# Altium PCB Poc_PCB.PcbDoc
Units mil, origin at the board's own origin, x right, y up, seen from the top; angles counter-clockwise.
Board outline 6000 x 4000 mil, 2 copper layers (Top Layer, Bottom Layer); 91 components, 126 nets, 336 pads, 12 vias.
Unrouted connection lines stored in the file: 189.
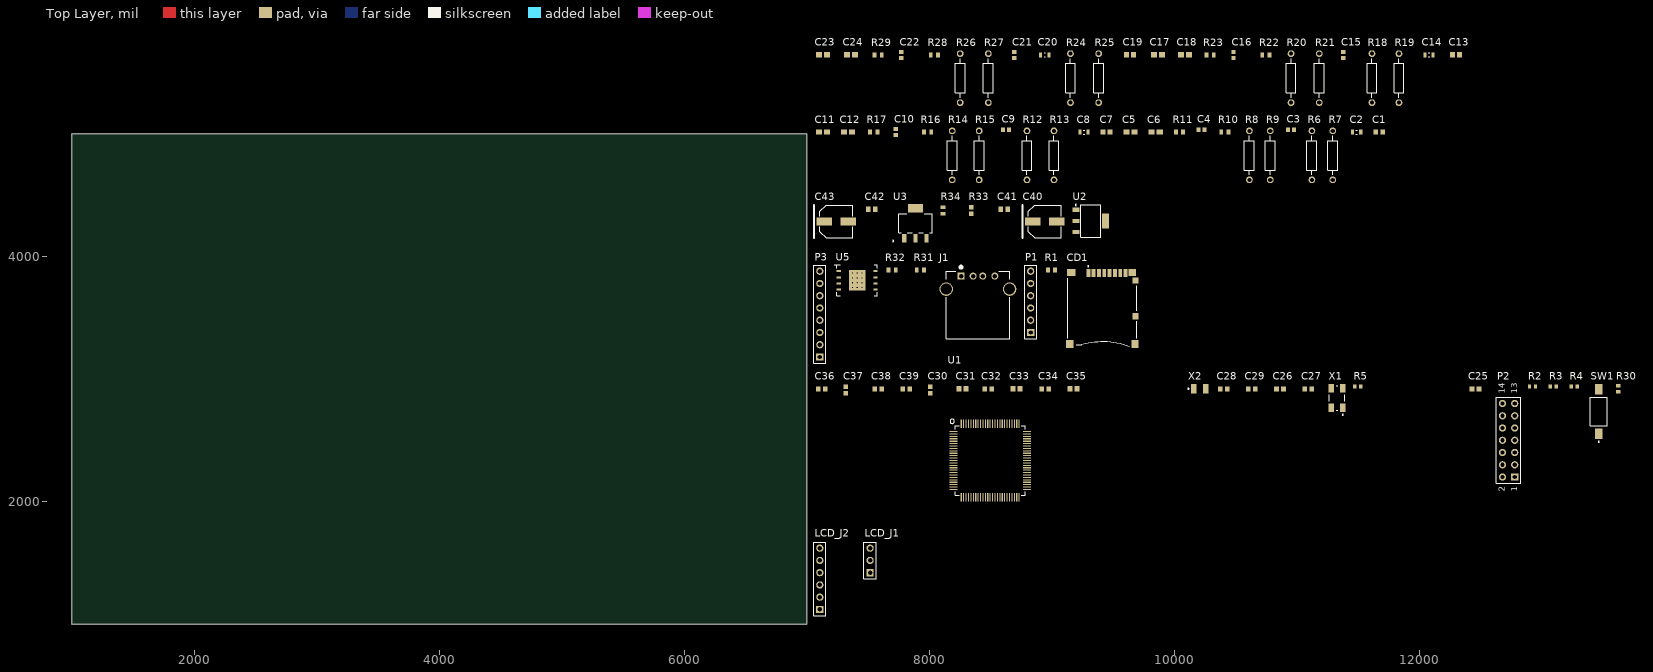
[diagram p0: Top Layer view]
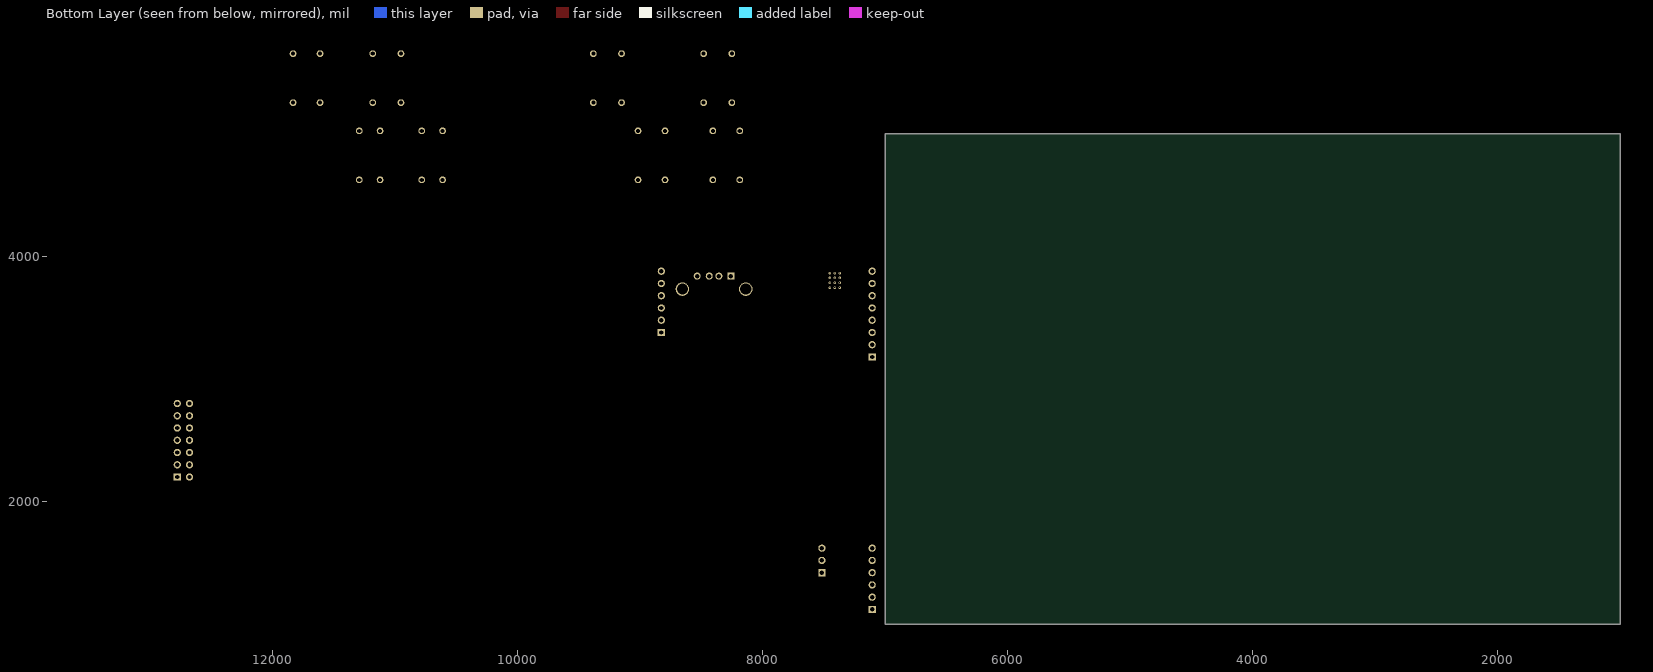
[diagram p1: Bottom Layer view, seen from below]

## Layer stack, top to bottom
Top Solder: solder mask 0.4, Solder Resist, Dk 3.5
Top Layer: signal copper 1.4
Dielectric 1: dielectric 12.6, FR-4, Dk 4.8
Bottom Layer: signal copper 1.4
Bottom Solder: solder mask 0.4, Solder Resist, Dk 3.5

## Board outline
1000,1000 7000,1000 7000,5000 1000,5000

## Design rules (kind name [scope] priority, off if disabled: settings)
Clearance [All] p1: gap=10 ignorepadtopadclearanceinfootprint=FALSE except(0: Arc-Hole Track-Hole SMDPad-Hole THPad-Hole Via-Hole Fill-Hole Poly-Hole Region-Hole Text-Hole)
PolygonConnect [All] p1: connectstyle=Relief reliefconductorwidth=10 reliefentries=4 polygonreliefangle="90 Angle" airgapwidth=10
RoomDefinition Z_Extruder_Motor_Drivers [InComponentClass('Z_Extruder_Motor_Drivers')] p1: confinementstyle=ConfineIn formatcopy=TRUE lockcomponents=FALSE outline 7045,5215 12405,5215 12405,5795 7045,5795
RoomDefinition X_Y_Motor_Drivers [InComponentClass('X_Y_Motor_Drivers')] p2: confinementstyle=ConfineIn formatcopy=TRUE lockcomponents=FALSE outline 7045,4585 11745,4585 11745,5165 7045,5165
RoomDefinition Power [InComponentClass('Power')] p3: confinementstyle=ConfineIn formatcopy=TRUE lockcomponents=FALSE outline 7045,4090 9475,4090 9475,4535 7045,4535
RoomDefinition Memory_USB [InComponentClass('Memory_USB')] p4: confinementstyle=ConfineIn formatcopy=TRUE lockcomponents=FALSE outline 7045,3120 9720,3120 9720,4040 7045,4040
RoomDefinition MCU [InComponentClass('MCU')] p5: confinementstyle=ConfineIn formatcopy=TRUE lockcomponents=FALSE outline 7045,1835 13785,1835 13785,3070 7045,3070
RoomDefinition LCD [InComponentClass('LCD')] p6: confinementstyle=ConfineIn formatcopy=TRUE lockcomponents=FALSE outline 7045,1060 7810,1060 7810,1790 7045,1790
RoutingVias [All] p1: holewidth=28 width=50 viastyle="Through Hole" minholewidth=28 minwidth=50 maxholewidth=28 maxwidth=50
SolderMaskExpansion [All] p1: expansion=4
Width [All] p1: maxlimit=10 minlimit=10 preferedwidth=10
30 further rules are at their usual default settings.

## Classes and differential pairs
component class Z_Extruder_Motor_Drivers: C13 C14 C15 C16 C17 C18 C19 C20 C21 C22 C23 C24 R18 R19 R20 R21 R22 R23 R24 R25 R26 R27 R28 R29 U7 U8
component class X_Y_Motor_Drivers: C1 C2 C3 C4 C5 C6 C7 C8 C9 C10 C11 C12 R6 R7 R8 R9 R10 R11 R12 R13 R14 R15 R16 R17 U4 U6
component class Power: C40 C41 C42 C43 R33 R34 U2 U3
component class Memory_USB: CD1 J1 P1 P3 R1 R31 R32 U5
component class MCU: C25 C26 C27 C28 C29 C30 C31 C32 C33 C34 C35 C36 C37 C38 C39 P2 R2 R3 R4 R5 R30 SW1 U1 X1 X2
component class LCD: LCD_J1 LCD_J2

## Components (designator, comment, footprint, x,y, rotation, side; value= is the part's Value field where it differs from the comment)
C1 "0.022uF" CAPC1608X87X35ML15T15 11670,5015 r0 top
C2 "0.22uF" TDK-C1608-2_A_M 11485,5015 r0 top
C3 "0.01uF" CAPC1608X87X35LL15T15 10950,5035 r0 top
C4 "0.01uF" CAPC1608X87X35LL15T15 10220,5035 r0 top
C5 "0.47uF" CAPC1608X90X35ML15T15 9640,5015 r0 top
C6 "0.47uF" CAPC1608X90X35ML15T15 9845,5015 r0 top
C7 "0.022uF" CAPC1608X87X35ML15T15 9445,5015 r0 top
C8 "0.22uF" TDK-C1608-2_A_M 9260,5015 r0 top
C9 "0.01uF" CAPC1608X87X35LL15T15 8625,5035 r0 top
C10 "0.01uF" CAPC1608X87X35LL15T15 7725,5015 r90 top
C11 "0.47uF" CAPC1608X90X35ML15T15 7130,5015 r0 top
C12 "0.47uF" CAPC1608X90X35ML15T15 7335,5015 r0 top
C13 "0.022uF" CAPC1608X87X35ML15T15 12295,5645 r0 top
C14 "0.22uF" TDK-C1608-2_A_M 12075,5645 r0 top
C15 "0.01uF" CAPC1608X87X35LL15T15 11375,5645 r90 top
C16 "0.01uF" CAPC1608X87X35LL15T15 10480,5645 r90 top
C17 "0.47uF" CAPC1608X90X35ML15T15 9865,5645 r0 top
C18 "0.47uF" CAPC1608X90X35ML15T15 10085,5645 r0 top
C19 "0.022uF" CAPC1608X87X35ML15T15 9635,5645 r0 top
C20 "0.22uF" TDK-C1608-2_A_M 8940,5645 r0 top
C21 "0.01uF" CAPC1608X87X35LL15T15 8690,5645 r90 top
C22 "0.01uF" CAPC1608X87X35LL15T15 7770,5645 r90 top
C23 "0.47uF" CAPC1608X90X35ML15T15 7130,5645 r0 top
C24 "0.47uF" CAPC1608X90X35ML15T15 7360,5645 r0 top
C25 "0.1uF" CAPC1608X90X35ML10T15 12455,2920 r0 top
C26 "GRM1885C1H120JA01D" CAPC1608X90X35ML10T15 10860,2920 r0 top
C27 "GRM1885C1H120JA01D" CAPC1608X90X35ML10T15 11090,2920 r0 top
C28 "GRM1885C1H120JA01D" CAPC1608X90X35ML10T15 10400,2920 r0 top
C29 "GRM1885C1H120JA01D" CAPC1608X90X35ML10T15 10630,2920 r0 top
C30 "1.0uF" CAPC1608X60X35NL10T15 8005,2910 r90 top
C31 "0.01uF" CAPC1608X87X35ML15T15 8270,2920 r0 top
C32 "0.1uF" CAPC1608X90X35ML10T15 8480,2920 r0 top
C33 "0.01uF" CAPC1608X87X35ML15T15 8710,2920 r0 top
C34 "0.1uF" CAPC1608X90X35ML10T15 8945,2920 r0 top
C35 "0.01uF" CAPC1608X87X35ML15T15 9175,2920 r0 top
C36 "2.2uF" CAPC1608X90X35ML10T15 7120,2920 r0 top
C37 "1.0uF" CAPC1608X60X35NL10T15 7315,2910 r90 top
C38 "0.1uF" CAPC1608X90X35ML10T15 7580,2920 r0 top
C39 "0.1uF" CAPC1608X90X35ML10T15 7810,2920 r0 top
C40 "EEEFP1V470AP" PNSC-FP-V-D_V 8940,4285 r0 top
C41 "0.1uF" CAPC1608X90X35ML10T15 8610,4385 r0 top
C42 "0.1uF" CAPC1608X90X35ML10T15 7530,4385 r0 top
C43 "EEEFP1V470AP" PNSC-FP-V-D_V 7240,4285 r0 top
CD1 "502774-0891" MOLX-502774-0891_V 9410,3575 r0 top
J1 "292303-1" TE-292303-1_V 8395,3795 r0 top
LCD_J1 "Header 3" HDR1X3 7515,1420 r90 top
LCD_J2 "Header 6" HDR1X6 7105,1120 r90 top
P1 "Header 6" HDR1X6 8825,3380 r90 top
P2 "Header 7X2" HDR2X7 12775,2200 r90 top
P3 "Header 8" HDR1X8 7105,3180 r90 top
R1 "100K" RESC1608X55X25ML10T15 8995,3890 r0 top
R2 "10k" RESC1608X55X30LL15T15 12920,2940 r0 top
R3 "10k" RESC1608X55X30LL15T15 13090,2940 r0 top
R4 "100" RESC1608X55X30LL15T15 13260,2940 r0 top
R5 "10k" RESC1608X55X30LL15T15 11495,2940 r0 top
R6 "?" AXIAL-0.4 11120,4825 r90 top value=1K
R7 "?" AXIAL-0.4 11290,4825 r90 top value=1K
R8 "Res2" AXIAL-0.4 10610,4825 r90 top value=1K
R9 "Res2" AXIAL-0.4 10780,4825 r90 top value=1K
R10 "5k" RESC1608X55X25ML10T15 10410,5015 r0 top
R11 "15k" RESC1608X55X25ML10T15 10040,5015 r0 top
R12 "?" AXIAL-0.4 8795,4825 r90 top value=1K
R13 "?" AXIAL-0.4 9015,4825 r90 top value=1K
R14 "Res2" AXIAL-0.4 8185,4825 r90 top value=1K
R15 "Res2" AXIAL-0.4 8405,4825 r90 top value=1K
R16 "5k" RESC1608X55X25ML10T15 7985,5015 r0 top
R17 "15k" RESC1608X55X25ML10T15 7545,5015 r0 top
R18 "?" AXIAL-0.4 11610,5455 r90 top value=1K
R19 "?" AXIAL-0.4 11830,5455 r90 top value=1K
R20 "Res2" AXIAL-0.4 10950,5455 r90 top value=1K
R21 "Res2" AXIAL-0.4 11180,5455 r90 top value=1K
R22 "5k" RESC1608X55X25ML10T15 10745,5645 r0 top
R23 "15k" RESC1608X55X25ML10T15 10290,5645 r0 top
R24 "?" AXIAL-0.4 9150,5455 r90 top value=1K
R25 "?" AXIAL-0.4 9380,5455 r90 top value=1K
R26 "Res2" AXIAL-0.4 8250,5455 r90 top value=1K
R27 "Res2" AXIAL-0.4 8480,5455 r90 top value=1K
R28 "5k" RESC1608X55X25ML10T15 8040,5645 r0 top
R29 "15k" RESC1608X55X25ML10T15 7580,5645 r0 top
R30 "10k" RESC1608X55X30LL15T15 13620,2920 r90 top
R31 "0" RESC1608X55X25ML10T15 7925,3890 r0 top
R32 "0" RESC1608X55X25ML10T15 7695,3890 r0 top
R33 "200" RESC1608X55X30NL20T20 8340,4375 r90 top
R34 "330" RESC1608X55X30NL15T15 8110,4375 r90 top
SW1 "FSMSMTR" TECO-FSMSMTR_V 13460,2735 r90 top
U1 "Part Number: TM4C123GH6PZI7" PZ100 8495,2335 r0 top value=Value
U2 "LM317AEMP/NOPB" DCY0004A_L 9315,4290 r0 top
U3 "Part Number: LM7805MPX/NOPB" DCY4 7885,4270 r0 top value=Value
U5 "MT25QL128ABA1EW9-0SIT" MICT-W9-8_L 7410,3805 r0 top
X1 "ABM3B-16.000MHZ-B2-T" ABRA-ABM3B-4_V 11325,2845 r90 top
X2 "ABS07-32.768KHz-T" ABRA-ABS07-2_V 10205,2920 r0 top

## Footprints (in the part's own frame and the unit in brackets; to place one, negate y for a bottom-side part, rotate by r counter-clockwise, add the part's x,y. Pads: shape width x height; smd on the part's side, far side on the other; paste and mask are expansions set on the pad)
ABRA-ABM3B-4_V [mm] "SMD, 4-Leads, Body 5x3.2mm"
  rect 1.8x1.2 smd: 1(-2,-1.2) 2(2,-1.2) 3(2,1.2) 4(-2,1.2)
  silkscreen extent -3.57,-1.6 2.5,1.6, body extent -2.5,-1.59 2.5,1.59, height 1.13
ABRA-ABS07-2_V [mm] "Hand Drawn, 2-Leads, Body 3.2x1.5mm, Pitch 2.5mm"
  rect 1.1x1.9 smd: 1(-1.25,0) 2(1.25,0)
  silkscreen extent -2.47,-0.12 -2.22,0.12, body extent -1.6,-0.75 1.6,0.75, height 0.9
AXIAL-0.4 [mm] "Axial Device, Thru-Hole; 2 Leads; 0.4 in Pin Spacing"
  round 1.4 hole 0.85: 1(-5.08,0) 2(5.08,0)
  silkscreen extent -4.06,-1.02 4.06,1.02
CAPC1608X60X35NL10T15 [mm] "Chip Capacitor, 2-Leads, Body 1.60x0.80mm, IPC Medium Density"
  rect 0.85x0.95 smd: 1(-0.675,0) 2(0.675,0)
  body extent -0.85,-0.45 0.85,0.45, height 0.6
CAPC1608X87X35LL15T15 [mm] "Chip Capacitor, 2-Leads, Body 1.60x0.80mm, IPC High Density"
  rect 0.8x0.9 smd: 1(-0.625,0) 2(0.625,0)
  body extent -0.87,-0.48 0.87,0.48, height 0.87
CAPC1608X87X35ML15T15 [mm] "Chip Capacitor, 2-Leads, Body 1.60x0.80mm, IPC Low Density"
  rect 1x1.1 smd: 1(-0.725,0) 2(0.725,0)
  body extent -0.87,-0.48 0.87,0.47, height 0.87
CAPC1608X90X35ML10T15 [mm] "Chip Capacitor, 2-Leads, Body 1.7x0.9mm, IPC Low Density"
  rect 0.95x1.05 smd: 1(-0.725,0) 2(0.725,0)
  body extent -0.85,-0.45 0.85,0.45, height 0.9
CAPC1608X90X35ML15T15 [mm] "Chip Capacitor, 2-Leads, Body 1.60x0.81mm, IPC Low Density"
  rect 1.25x1.1 smd: 1(-0.85,0) 2(0.85,0)
  body extent -0.88,-0.48 0.87,0.48, height 0.9
DCY4 [mil]
  rect 35x69.5 smd paste+0 mask+0: 1(-91,-122.75) 2(0,-122.75) 3(91,-122.75)
  rect 124x69.5 smd paste+0 mask+0: 4(0,122.75)
  silkscreen extent -187,-148 137,78, body extent -132,-144 132,144, height 67
DCY0004A_L [mm] "SOT223, 4-Leads, Body 6.7x3.7mm, Pitch 2.3mm, IPC High Density"
  rrect11% 1.45x0.9 smd: 1(-3.075,2.3) 2(-3.075,0) 3(-3.075,-2.3)
  rrect7% 1.45x3.15 smd: 4(3.075,0)
  silkscreen extent -3.2,-3.35 2.05,3.42, body extent -3.5,-3.25 3.5,3.25, height 1.62
HDR1X3 [mm] "Connector; Header; 3 Position"
  rect 1.5x1.5 hole 0.9: 1(0,0)
  round 1.5 hole 0.9: 2(2.54,0) 3(5.08,0)
  silkscreen extent -1.27,-1.27 6.35,1.27
HDR1X6 [mm] "Connector; Header; 6 Position"
  rect 1.5x1.5 hole 0.9: 1(0,0)
  round 1.5 hole 0.9: 2(2.54,0) 3(5.08,0) 4(7.62,0) 5(10.16,0) 6(12.7,0)
  silkscreen extent -1.27,-1.27 13.97,1.27
HDR1X8 [mm] "Connector; Header; 8 Position"
  rect 1.5x1.5 hole 0.9: 1(0,0)
  round 1.5 hole 0.9: 2(2.54,0) 3(5.08,0) 4(7.62,0) 5(10.16,0) 6(12.7,0) 7(15.24,0) 8(17.78,0)
  silkscreen extent -1.27,-1.27 19.05,1.27
HDR2X7 [mm] "Connector; Header; 7x2 Position"
  rect 1.5x1.5 hole 0.9: 1(0,0)
  round 1.5 hole 0.9: 2(0,2.54) 3(2.54,0) 4(2.54,2.54) 5(5.08,0) 6(5.08,2.54) 7(7.62,0) 8(7.62,2.54) 9(10.16,0) 10(10.16,2.54) 11(12.7,0) 12(12.7,2.54) 13(15.24,0) 14(15.24,2.54)
  silkscreen extent -1.27,-1.27 16.51,3.81
MICT-W9-8_L [mm] "SON, 8-Leads, Body 8.1x6.1mm, Pitch 1.27mm, Thermal Pad 3.4x4.3mm, IPC High Density"
  rect 0.85x0.4 smd: 1(-3.82,1.905) 2(-3.82,0.635) 3(-3.82,-0.635) 4(-3.82,-1.905) 5(3.82,-1.905) 6(3.82,-0.635) 7(3.82,0.635) 8(3.82,1.905)
  rect 3.4x4.3 smd paste-1.7: 9(0,0)
  silkscreen extent -4.65,-3.2 4.2,3.25, body extent -4.05,-3.05 4.05,3.05, height 0.8
MOLX-502774-0891_V [mm] "SMD, 14-Leads, Body 15x14.3mm, Pitch 1.1mm"
  rect 0.8x1.68 smd: 1(-2.9,7.385) 2(-1.8,7.385) 3(-0.7,7.385) 4(0.4,7.385) 5(1.5,7.385) 6(2.6,7.385) 7(3.7,7.385) 8(4.8,7.385)
  rect 1.29x1.3 smd: 9(6.855,5.825)
  rect 1.29x1.4 smd: 10(6.855,-1.575)
  rect 1.5x1.7 smd: 11(6.75,-7.375) 12(-6.75,-7.375)
  rect 1.7x1.5 smd: 13(-6.45,7.475)
  rect 1.6x1.5 smd: 14(6.21,7.475)
  silkscreen extent -7.15,-7.88 7.15,8.9, body extent -7.15,-8 7.15,8, height 1.78
PNSC-FP-V-D_V [mm] "CAPAE, 2-Leads, Body 6.80x6.80mm"
  rect 3.2x1.6 smd: 1(-2.5,0) 2(2.5,0)
  silkscreen extent -4.6,-3.4 3.4,3.4, body extent -3.9,-3.4 3.9,3.4, height 6.1
PZ100 [mil]
  rect 66x9 smd paste+0 mask+0: 1(-300,236.22) 2(-300,216.54) 3(-300,196.85) 4(-300,177.17) 5(-300,157.48) 6(-300,137.8) 7(-300,118.11) 8(-300,98.43) 9(-300,78.74) 10(-300,59.06) 11(-300,39.37) 12(-300,19.69) 13(-300,0) 14(-300,-19.68) 15(-300,-39.37) 16(-300,-59.06) 17(-300,-78.74) 18(-300,-98.43) 19(-300,-118.11) 20(-300,-137.8) 21(-300,-157.48) 22(-300,-177.17) 23(-300,-196.85) 24(-300,-216.54) 25(-300,-236.22) 51(300,-236.22) 52(300,-216.54) 53(300,-196.85) 54(300,-177.17) 55(300,-157.48) 56(300,-137.8) 57(300,-118.11) 58(300,-98.43) 59(300,-78.74) 60(300,-59.06) 61(300,-39.37) 62(300,-19.68) 63(300,0) 64(300,19.68) 65(300,39.37) 66(300,59.06) 67(300,78.74) 68(300,98.43) 69(300,118.11) 70(300,137.8) 71(300,157.48) 72(300,177.17) 73(300,196.85) 74(300,216.54) 75(300,236.22)
  rect 9x66 smd paste+0 mask+0: 26(-236.22,-300) 27(-216.54,-300) 28(-196.85,-300) 29(-177.17,-300) 30(-157.48,-300) 31(-137.8,-300) 32(-118.11,-300) 33(-98.43,-300) 34(-78.74,-300) 35(-59.06,-300) 36(-39.37,-300) 37(-19.68,-300) 38(0,-300) 39(19.68,-300) 40(39.37,-300) 41(59.06,-300) 42(78.74,-300) 43(98.43,-300) 44(118.11,-300) 45(137.8,-300) 46(157.48,-300) 47(177.17,-300) 48(196.85,-300) 49(216.54,-300) 50(236.22,-300) 76(236.22,300) 77(216.54,300) 78(196.85,300) 79(177.17,300) 80(157.48,300) 81(137.8,300) 82(118.11,300) 83(98.43,300) 84(78.74,300) 85(59.06,300) 86(39.37,300) 87(19.68,300) 88(0,300) 89(-19.68,300) 90(-39.37,300) 91(-59.06,300) 92(-78.74,300) 93(-98.43,300) 94(-118.11,300) 95(-137.8,300) 96(-157.48,300) 97(-177.17,300) 98(-196.85,300) 99(-216.54,300) 100(-236.22,300)
  silkscreen extent -328,-284 284,338, body extent -319,-319 319,760, height 63
RESC1608X55X25ML10T15 [mm] "Chip Resistor, 2-Leads, Body 1.60x0.80mm, IPC Low Density"
  rect 0.8x1 smd: 1(-0.75,0) 2(0.75,0)
  body extent -0.85,-0.45 0.85,0.45, height 0.55
RESC1608X55X30LL15T15 [mm] "Chip Resistor, 2-Leads, Body 1.60x0.80mm, IPC High Density"
  rect 0.7x0.85 smd: 1(-0.625,0) 2(0.625,0)
  body extent -0.87,-0.48 0.87,0.48, height 0.55
RESC1608X55X30NL15T15 [mm] "Chip Resistor, 2-Leads, Body 1.60x0.80mm, IPC Medium Density"
  rect 0.8x0.95 smd: 1(-0.675,0) 2(0.675,0)
  body extent -0.87,-0.48 0.87,0.48, height 0.55
RESC1608X55X30NL20T20 [mm] "Chip Resistor, 2-Leads, Body 1.60x0.80mm, IPC Medium Density"
  rect 0.9x1 smd: 1(-0.65,0) 2(0.65,0)
  body extent -0.9,-0.5 0.9,0.5, height 0.55
TDK-C1608-2_A_M [mm] "Chip Capacitor, 2-Leads, Body 1.7x0.9mm, IPC Low Density"
  rect 0.65x1.05 smd: 1(-0.85,0) 2(0.85,0)
  silkscreen extent -0.15,-0.43 0.15,0.43, body extent -0.85,-0.45 0.85,0.45, height 0.9
TE-292303-1_V [mm] "THD, 4-Leads, Body 13.13x14mm, Pitch 2.5mm"
  rect 1.45x1.45 hole 0.92: 1(-3.5,1.144)
  round 1.45 hole 0.92: 2(-1,1.144) 3(1,1.144) 4(3.5,1.144)
  round 2.8 hole 2.3: 5(-6.57,-1.566) 6(6.57,-1.566)
  silkscreen extent -6.57,-11.85 6.57,3.25, body extent -8.12,-11.85 8.12,2.15, height 7.72
TECO-FSMSMTR_V [mm] "SMD, 2-Leads, Body 6x3.5mm, Pitch 9.19mm"
  rect 2.2x1.6 smd: 1(-4.595,0)
  rect 2.18x1.6 smd: 2(4.595,0)
  silkscreen extent -6.37,-1.75 3,1.75, body extent -4.98,-1.75 4.98,1.75, height 4.4

## Part data
C1 C7 C13 C19: library part CMP-2006-03139-1, Manufacturer=Kemet, Part Number=C0603C223K4RACTU
C2 C8 C14 C20: library part CMP-2000-05394-1, "Cap Ceramic, 0.22 uF, +/- 10%, -55 to 125 degC, 2-Pin SMD (0603), RoHS, Tape and Reel", Capacitance=0.22µF, Manufacturer=TDK, Operating Temperature=-55degC~125degC, Package / Case=0603(1608Metric), Package Description="2-Pin Chip Capacitor, Body 1.7 x 0.9 mm", Package Reference=603, PCN Part Number=MLCCPartNumberChange30/Nov/2012, Ratings=-, Standard Package=1, Temperature Coefficient=X7R, Tolerance=±10%, Voltage - Rated=50V, Applications=GeneralPurpose, Category=Capacitors, Datasheet URL=https://datasheet.ciiva.com/24218/c1608x7r1h224k080ab-264841-24218813.pdf, Datasheet Version=Sep-13, Design Resources=20WNon-IsolatedBuckLEDDriverUsingPLLNK460KG, Family=CeramicCapacitors, Features=-, Height - Seated (Max)=-, Kits=445-9014-KIT-ND-KITMLCC100PF-22UF060310-50V445-9003-KIT-ND-KITCAPCERHICAPMLCCSMD445-173086-KIT-ND-C0402-2220X7R6.3-50V1,000PF-, Lead Spacing=-, Lead Style=-, Manufacturer URL=http://www.tdk.com/, Mounting Type=SurfaceMount,MLCC, Online Catalog=CSeries,GeneralPurpose, Other Names=445-7408-1, Packaging=CutTape(CT), Product Training Modules=CSeriesGeneralApplicationsSEAT,CCV,andTVCLDesignToolsGuidetoReplacinganElectrolyticCapacitorwithanMLCC, RoHS Information=RoHSCertificate-MLCC, Series=C, Size / Dimension="0.063\"Lx0.031\"W(1.60mmx0.80mm)", Thickness (Max)="0.035\"(0.90mm)"
C3 C4 C9 C10 C15 C16 C21 C22: library part CMP-2006-03299-1, Manufacturer=Kemet, Part Number=C0603X103K5RACTU
C5 C6 C11 C12 C17 C18 C23 C24: library part CMP-2006-04187-1, Manufacturer="AVX Interconnect / Elco", Part Number=06033C474KAT2A
C25 C32 C34 C38 C39 C41 C42: library part CMP-2100-03643-1, "Chip Capacitor, 0.1 uF, +/- 10%, 50 V, -55 to 125 degC, 0603 (1608 Metric), RoHS, Tape and Reel", Capacitance=100nF, Case/Package=0603, Case Code (Metric)=1608, Dielectric=X7R, Dielectric Material=Ceramic, Insulation Resistance=10GR, Manufacturer=Murata, Max Operating Temperature=125degC, Min Operating Temperature=-55degC, Package Description="2-Pin Surface Mount Device, Body 1.6 x 0.8 mm", Package Quantity=1, Tolerance=10%, Voltage=50V, Case Code (Imperial)=0603, Contact Plating=Tin, Datasheet URL=http://psearch.en.murata.com/capacitor/product/GRM188R71H104KA93%23.pdf, Datasheet Version=42675.0, Depth=0.8mm, Height=0.8mm, Lead Free=LeadFree, Length=1.6mm, Manufacturer URL=http://www.murata.com/, Material=Ceramic, Mount=SurfaceMount, Number of Pins=2, Package Reference=0603, Packaging=TapeandReel, Radiation Hardening=No, REACH SVHC=NoSVHC, RoHSCompliant=true, Termination=SMD/SMT, Thickness=0.035inch, Voltage Rating=50V, Voltage Rating (DC)=50V, Width=0.8mm
C26 C27 C28 C29: library part CMP-2006-02602-1, Manufacturer=Murata, Part Number=GRM1885C1H120JA01D
C30 C37: library part CMP-2006-00116-1, Manufacturer=Murata, Part Number=GRM185R61C105KE44J
C31 C33 C35: library part CMP-2006-03042-1, Manufacturer=Kemet, Part Number=C0603C103K4RACTU
C36: library part CMP-2006-02836-1, Manufacturer=Murata, Part Number=GRM188R71A225KE15D
C40 C43: library part CMP-2000-06216-1, "Aluminum Electrolytic Capacitor, 47 uF, +/- 20%, 35 V, 2-Pin SMD (Size Code D), -55 to 105 degC, RoHS, Tape and Reel", Capacitance=47µF, Case Size/Dimension=Ø6.3x5.8mm, ESR (Equivalent Series Resistance)=0.26O, Lifetime@Temperature=2000Hrs@105°C, Manufacturer=Panasonic, Operating Temp-Max=105°C, Operating Temp Range=-55to+105°C, Package Description="2-Pin Electrolytic Aluminum Capacitor, Body 6.6 x 6.6 mm", Package Reference=FP-V-D, Rated Voltage=35V, Ripple Current=300mA, Datasheet URL=http://industrial.panasonic.com/cdbs/www-data/pdf/RDE0000/ABA0000C1184.pdf, Datasheet Version=03/2016, Manufacturer URL=http://www.panasonic.com/, Mounting Technology=SurfaceMount, Package URL=http://industrial.panasonic.com/cdbs/www-data/pdf/RDE0000/DME0000COL48.pdf, Series=FP, Type=Can
CD1: library part CMP-2000-05248-1, "Micro SD Memory Card Connector, 0.5 A, 10 V (DC), -25 to 85 degC, 8-Pin SMT, RoHS, Tape and Reel", Manufacturer=Molex, Standard Package=1, 3D Model=502774-0891.stp, Card Type=SecureDigital-microSD™, Catalog Drawings=502774-0891, Category=Connectors,Interconnects, Connector Type=ConnectorandEjector, Contact Finish=Gold, Contact Finish Thickness=20µin(0.51µm), Datasheet URL=https://datasheet.ciiva.com/1104/1499551-1104671.pdf, Datasheet Version="Rev. D, 04/2004", Ejector Side=-, Family=MemoryConnectors-PCCardSockets, Features=Switch, Height Above Board="0.071\"(1.80mm)", Insertion, Removal Method=PushIn,PushOut, Manufacturer URL=http://www.molex.com/, Mounting Feature=Reverse-Bottom, Mounting Type=SurfaceMount,RightAngle, Number of Positions=10(8+2), Online Catalog=microSD™Series, Other Names=WM24066DKR, Packaging=Digi-Reel, RoHS Information=502774-0891CertofCompliance, Series=502774
J1: library part CMP-2000-05404-1, "1 Port Right Angle Through Hole Mount Female Type A USB Connector, 4 Position, -55 to 85 degC, RoHS, Tube", Manufacturer="TE Connectivity", Package Description="4-Pin Through Hole Device, Body 14 x 13.13 mm, Pitch 2.5 mm", Connector Mounting=PCB, Connector Type=USBA, Contact Material=Copper, Contact Plating=Gold, Contact Termination Type=Solder, Datasheet URL=http://www.farnell.com/cad/1653030.pdf, Datasheet Version=Feb-12, Gender=Receptacle, Manufacturer URL=http://www.te.com/, No. of Contacts=4, Package Reference=292303-1, SVHC=NoSVHC(16-Jun-2014)
LCD_J1: "Header, 3-Pin", LatestRevisionDate=17-Jul-2002, LatestRevisionNote="Re-released for DXP Platform.", Publisher="Altium Limited"
LCD_J2 P1: "Header, 6-Pin", LatestRevisionDate=17-Jul-2002, LatestRevisionNote="Re-released for DXP Platform.", Publisher="Altium Limited"
P2: "Header, 7-Pin, Dual row", LatestRevisionDate=17-Jul-2002, LatestRevisionNote="Re-released for DXP Platform.", Publisher="Altium Limited"
P3: "Header, 8-Pin", LatestRevisionDate=17-Jul-2002, LatestRevisionNote="Re-released for DXP Platform.", Publisher="Altium Limited"
R1: library part CMP-2100-03662-1, "Chip Resistor, 100 KOhm, +/- 1%, 0.1 W, -55 to 155 degC, 0603 (1608 Metric), RoHS, Tape and Reel", Case/Package=0603, Case Code (Metric)=1608, Manufacturer=Yageo, Max Operating Temperature=155degC, Min Operating Temperature=-55degC, Package Description="2-Pin Surface Mount Device, Body 1.6 x 0.8 mm", Power Rating=100mW, Resistance=100KOhm, Temperature Coefficient=100ppm/degreesC, Tolerance=1%, Voltage Rating=50V, Case Code (Imperial)=0603, Composition=ThickFilm, Datasheet URL=http://www.yageo.com/NewPortal/yageodocoutput?fileName=/pdf/R-Chip/PYu-RC_Group_51_RoHS_L_5.pdf, Datasheet Version="Rev. 5, 10/2016", Depth=0.8mm, Height=0.45mm, Lead Free=LeadFree, Length=1.6mm, Manufacturer URL=http://www.yageo.com/, Military Standard=Not, Number of Pins=2, Package Reference=0603, Packaging=TapeandReel, REACH SVHC=NoSVHC, RoHSCompliant=true, Termination=SMD/SMT, Voltage Rating (DC)=50V, Width=0.8mm
R2 R3 R4 R5 R30: library part CMP-2000-00181-1, Manufacturer=Panasonic, Part Number=ERJ-3EKF1002V
R6 R7 R12 R13 R18 R19 R24 R25: library part Res2, "Resistor", LatestRevisionDate=17-Jul-2002, LatestRevisionNote="Re-released for DXP Platform.", PackageDescription="Axial Device, Thru-Hole; 2 Leads; 0.4 in Pin Spacing", PackageReference=AXIAL-0.4, Published=8-Jun-2000, Publisher="Altium Limited"
R8 R9 R14 R15 R20 R21 R26 R27: "Resistor", LatestRevisionDate=17-Jul-2002, LatestRevisionNote="Re-released for DXP Platform.", PackageDescription="Axial Device, Thru-Hole; 2 Leads; 0.4 in Pin Spacing", PackageReference=AXIAL-0.4, Published=8-Jun-2000, Publisher="Altium Limited"
R10 R11 R16 R17 R22 R23 R28 R29 R31 R32: library part CMP-2100-03667-1, "Chip Resistor, 0 Ohm, +/- 5%, 0.1 W, -55 to 155 degC, 0603 (1608 Metric), RoHS, Tape and Reel", Case/Package=0603, Case Code (Metric)=1608, Manufacturer=Yageo, Max Operating Temperature=155degC, Min Operating Temperature=-55degC, Package Description="2-Pin Surface Mount Device, Body 1.6 x 0.8 mm", Package Quantity=5000, Power Rating=100mW, Resistance=0mOhm, Temperature Coefficient=200ppm/degreesC, Tolerance=5%, Voltage Rating=50V, Case Code (Imperial)=0603, Composition=ThickFilm, Contact Plating=Tin, Datasheet URL=http://www.yageo.com/NewPortal/yageodocoutput?fileName=/pdf/R-Chip/PYu-RC_Group_51_RoHS_L_5.pdf, Datasheet Version="Rev. 5, 10/2016", Depth=0.8mm, Height=0.45mm, Lead Free=LeadFree, Length=1.6mm, Manufacturer URL=http://www.yageo.com/, Military Standard=Not, Number of Pins=2, Package Reference=0603, Packaging=TapeandReel, Radiation Hardening=No, REACH SVHC=NoSVHC, RoHSCompliant=true, Termination=SMD/SMT, Voltage Rating (DC)=50V, Width=0.8mm
R33: library part CMP-2000-00944-1, Manufacturer=Panasonic, Part Number=ERA3AEB201V
R34: library part CMP-2000-00435-1, Manufacturer=Panasonic, Part Number=ERJ3EKF3300V
SW1: library part CMP-2000-07501-1, "FSMSM Push Button Switch, 50 mA, -35 to 85 degC, 2-Pin SMD, RoHS, Tape and Reel", Case\/Package=SMD/SMT, Contact Current Rating=50mA, Contact Resistance=100mOhm, Manufacturer="TE Connectivity", Max Operating Temperature=85degC, Max Voltage Rating (DC)=12V, Min Operating Temperature=-35degC, Operating Force=180gf, Package Description="2-Pin Surface Mount Device, Body 6 x 3.5 mm, Pitch 9.19 mm", Package Quantity=1800, Voltage Rating (DC)=24V, Actuator Length=1.07mm, Actuator Material=Polyamide, Contact Material=Brass, Contact Plating=Silver, Current Rating=50mA, Datasheet URL=http://www.te.com/commerce/DocumentDelivery/DDEController?Action=showdoc&DocId=Customer+Drawing%7F1437566-3%7FC2%7Fpdf%7FEnglish%7FENG_CD_1437566-3_C2_1437566_3_1_c.dwg.pdf%7F1437566-4, Datasheet Version="Rev. C2, 08/2014", Electrical Life=20000Cycles, ELV=Compliant, Illumination Type=Illuminated, Lead Free=LeadFree, Manufacturer URL=http://www.te.com/, Mechanical Life=20000Cycles, Mount=SurfaceMount, Mounting Technology=SurfaceMount, Orientation=Straight, Package Reference=FSMSMTR, Packaging=TapeandReel, REACH SVHC=Unknown, RoHSCompliant=true, Switch Travel=0.25mm, Termination=GullWing, Throw Configuration=SPST
U1: library part TM4C123GH6PZI7, "No Description Available", Built_By=EMA_UL_Team, Copyright="Copyright (C) 2018 Accelerated Designs. All rights reserved", Manufacturer_Part_Number=TM4C123GH6PZI7, RefDes=RefDes, Type=DEV, Vendor="Texas Instruments"
U2: library part CMP-0062-01710-3, "3-Terminal Adjustable Regulator, 4-pin SOT-223, Pb-Free", Manufacturer="Texas Instruments", PackageTopMarking=XYTT*N07A, PowerWise=N, Code_IPC=SOT223-4, Code_JEDEC=TO-261-AA, ComponentLink1Description="Datasheet URL", ComponentLink1URL=http://www.ti.com/general/docs/lit/getliterature.tsp?genericPartNumber=LM317-N&fileType=pdf, CompType="LDO IC", PackageDescription="Molded SOT-223, 6.50 x 3.56 x 1.6mm Body, 4 Lead, 2.3mm Pitch", PackageReference=DCY0004A, PinCount=4, RoHS=Y
U3: library part LM7805MPX/NOPB, "No Description Available", Built_By=EMA_Jessica, Copyright="Copyright (C) 2018 Accelerated Designs. All rights reserved", Manufacturer_Part_Number=LM7805MPX/NOPB, RefDes=RefDes, Type=DEV, Vendor="Texas Instruments"
U5: library part CMP-2000-07470-1, "Micron Serial NOR Flash Memory, 2.7 to 3.6 V, 128 Mb, -40 to 85 degC, 8-Pin W-PDFN (W9), RoHS, Tape and Reel", Manufacturer=Micron, Package Description="8-Pin Plastic Dual Flat No-lead Package, Body 8 x 6 mm, Pitch 1.27 mm", Package Reference=W9, Datasheet URL=https://www.micron.com/~/media/documents/products/data-sheet/nor-flash/serial-nor/mt25q/die-rev-a/mt25q_qlhs_l_128_aba_0.pdf, Datasheet Version="Rev. I , 09/2016", Manufacturer URL=http://www.micron.com/, Mounting Technology=SurfaceMount, RoHSCompliant=false
X1: library part CMP-1688-00003-1, "Ceramic SMD Crystal, 16 MHz, +/- 20 ppm, 50 Ohm, -20 to 70 degC, 4-Pin SMD, RoHS, Tape and Reel", Case/Package=5028, Current Rating="1.82 A", Max Operating Temperature=105degC, Min Operating Temperature=-40degC, Package Quantity=500, Resistance="0.033 Ohm", Tolerance=30%, ComponentLink1Description="Manufacturer URL", ComponentLink1URL=http://www.abracon.com/, ComponentLink2Description=Datasheet, ComponentLink2URL=http://www.abracon.com/Resonators/abm3b.pdf, DatasheetVersion=Aug-15, Height="2.8 mm", Length="0.197 inch", Mount="Surface Mount", PackageDescription="4-Pin Surface Mount Device, Body 5 x 3.2 mm", PackageReference=ABM3B, Packaging="Tape and Reel", REACH SVHC=Unknown, RoHSCompliant=True, Shielding=Shielded, Width="0.197 inch"
X2: library part CMP-0447-00001-2, "Crystal, 32.768 kHz, 12.5 pF, -40 to 85 degC, SMD Low Profile 3.2 x 1.5 x 0.9 mm, Tape and Reel", Equivalent Series Resistance (R1)="70 Kohm", Frequency="32.768 kHz", Frequency Tolerance @+25degC="+/- 20 ppm", Insulation Resistance (Min)="500 Mohm", Load Capacitance (CL)="12.5 pF", Manufacturer=Abracon, Operating Temperature="-40 to 85 degC", Q Value (Type)=30000, Shunt Capacitance (C0)="0.9 to 1.2 pF", ComponentLink1Description="Manufacturer URL", ComponentLink1URL=http://www.abracon.com/, ComponentLink2Description=Datasheet, ComponentLink2URL=http://www.abracon.com/Resonators/ABS07.pdf, ComponentLink3Description="Package Specification", ComponentLink3URL=http://www.abracon.com/Resonators/ABS07.pdf, DatasheetVersion=04.03.13, Drive Level (Type)="0.1 uW", Mounting Technology="Surface Mount", Operation Mode="Flexural Mode (Tuning Fork)", PackageDescription="2-Pin Hand Drawn, Body 3.2x1.5mm, Pitch 2.5mm", PackageReference=ABS07-2, Packing="Tape and Reel", PartNumber=ABS07-32.768KHz-T

## Via types
v1: diameter 19.68, hole 7.87, Top Layer to Bottom Layer, 12 vias

## Nets (pads, with @x,y where several pads share a name; then routed paths per layer and width w, separated by ;. In a path a pad name is that pad's centre, name@x,y a point inside that pad or via, vN(x,y) a via of type N, cw(c..) or ccw(c..) an arc to the next point about the centre after c; other vN are vias at no path point)
3V3: R2.2 R3.2 R4.2 R6.2 R7.2 R12.2 R13.2 R18.2 R19.2 R24.2 R25.2
+3V3: CD1.4 P3.1 R1.2 R30.2 U5.8
+5V: C43.1 J1.1 LCD_J1.3 LCD_J2.6 R31.2 U3.3
+24V: C41.2 C42.2 U2.3 U3.1
Clock: CD1.5 P1.3
Data_In: CD1.3 P1.4
Data_Out: CD1.7 P1.2
EX_\SLEEP: U1.99
EX_AOUT1: 
EX_AOUT2: 
EX_BOUT1: 
EX_BOUT2: 
EX_CPH: C19.1
EX_CPL: C19.2
EX_Decay: R24.1 R26.2
EX_DIR: U1.97
EX_ENABLE: U1.98
EX_M0: U1.95
EX_M1: U1.91
EX_nFAULT: R28.2 U1.100
EX_STEP: 
EX_TRQ: R25.1 R27.2
EX_VCP: C20.2
EX_VM: C20.1 C21.1 C22.1
FLASH_Clk: P3.4 U1.42 U5.6
FLASH_Hold: P3.7 U5.7
FLASH_MISO: P3.3 U1.40 U5.2
FLASH_MOSI: P3.2 U1.41 U5.5
FLASH_nCS: P3.5 U1.43 U5.1
FLASH_WP: P3.6 U5.3
GND: C3.2 C4.2 C5.1 C6.1 C9.2 C10.2 C11.1 C12.1 C15.2 C16.2 C17.1 C18.1 C21.2 C22.2 C23.1 C24.1 C25.1 C26.1 C27.1 C30.1 C31.1 C32.1 C33.1 C34.1 C35.1 C36.1 C37.1 C38.1 C39.1 C41.1 C42.1 C43.2 CD1.6 CD1.11 CD1.12 CD1.13 CD1.14 J1.4 LCD_J1.2 LCD_J2.5 P1.1 P2.4 P2.8 P2.10 P2.12 P3.8 R5.1 R8.1 R9.1 R11.1 R14.1 R15.1 R17.1 R20.1 R21.1 R23.1 R26.1 R27.1 R29.1 R32.1 R34.1 SW1.1 U1.6 U1.10 U1.21 U1.33 U1.45 U1.57 U1.64 U1.81 U1.94 U3.2 U3.4 U5.4 U5.9 X1.2 X1.4
  other v1: 7370.63,3745.94 7410,3745.94 7449.37,3745.94 7370.63,3785.32 7410,3785.32 7449.37,3785.32 7370.63,3824.68 7410,3824.68 7449.37,3824.68 7370.63,3864.06 7410,3864.06 7449.37,3864.06
JTAG_TCK: P2.11 R3.1 U1.85
JTAG_TDI: P2.3 U1.83
JTAG_TDO: P2.7 R5.2 U1.82
JTAG_TMS: P2.1 R2.1 U1.84
nCS: CD1.2 P1.5 R1.1
NetC5_2: C5.2
NetC6_2: C6.2 R10.1
NetC11_2: C11.2
NetC12_2: C12.2 R16.1
NetC17_2: C17.2
NetC18_2: C18.2 R22.1
NetC23_2: C23.2
NetC24_2: C24.2 R28.1
NetC25_2: C25.2 R30.1 SW1.2 U1.63
NetC26_2: C26.2 U1.65 X1.1
NetC27_2: C27.2 U1.66 X1.3
NetC28_1: C28.1 U1.52 X2.1
NetC28_2: C28.2 C29.1 U1.53
NetC29_2: C29.2 U1.54 X2.2
NetC30_2: C30.2 C31.2 C32.2 C33.2 C34.2 C35.2 U1.5 U1.20 U1.32 U1.44 U1.55 U1.56 U1.67 U1.80 U1.93
NetC36_2: C36.2 C37.2 C38.2 C39.2 U1.38 U1.86
NetC40_1: C40.1 R33.2 U2.2
NetJ1_2: J1.2 U1.68
NetJ1_3: J1.3 U1.69
NetJ1_5: J1.5 J1.6 R32.2
NetLCD_J2_1: LCD_J2.1 U1.29
NetLCD_J2_3: LCD_J2.3 U1.28
NetLCD_J2_4: LCD_J2.4 U1.31
NetP2_5: P2.5 R4.1
NetR11_2: R11.2
NetR17_2: R17.2
NetR23_2: R23.2
NetR29_2: R29.2
NetR31_1: R31.1 U1.71
NetR33_1: R33.1 R34.2 U2.1
NetU1_24: U1.24
NetU1_46: U1.46
NetU1_47: U1.47
NetU1_48: U1.48
NetU1_49: U1.49
NetU1_51: U1.51
NetU1_59: U1.59
NetU1_96: U1.96
VCC: P1.6
X_\SLEEP: U1.15
X_AOUT1: 
X_AOUT2: 
X_BOUT1: 
X_BOUT2: 
X_CPH: C1.1
X_CPL: C1.2
X_Decay: R6.1 R8.2
X_DIR: U1.13
X_ENABLE: U1.14
X_M0: U1.12
X_M1: U1.11
X_nFAULT: R10.2 U1.17
X_STEP: U1.16
X_TRQ: R7.1 R9.2
X_VCP: C2.2
X_VM: C2.1 C3.1 C4.1
Y_\SLEEP: U1.26
Y_AOUT1: 
Y_AOUT2: 
Y_BOUT1: 
Y_BOUT2: 
Y_CPH: C7.1
Y_CPL: C7.2
Y_Decay: R12.1 R14.2
Y_DIR: U1.23
Y_ENABLE: 
Y_M0: U1.22
Y_M1: U1.19
Y_nFAULT: R16.2 U1.27
Y_STEP: U1.25
Y_TRQ: R13.1 R15.2
Y_VCP: C8.2
Y_VM: C8.1 C9.1 C10.1
Z_\SLEEP: U1.72
Z_AOUT1: 
Z_AOUT2: 
Z_BOUT1: 
Z_BOUT2: 
Z_CPH: C13.1
Z_CPL: C13.2
Z_Decay: R18.1 R20.2
Z_DIR: U1.61
Z_ENABLE: U1.62
Z_M0: U1.60
Z_M1: U1.58
Z_nFAULT: R22.2 U1.73
Z_STEP: 
Z_TRQ: R19.1 R21.2
Z_VCP: C14.2
Z_VM: C14.1 C15.1 C16.1
pads on no net: C40.2 CD1.1 CD1.8 CD1.9 CD1.10 LCD_J1.1 LCD_J2.2 P2.2 P2.6 P2.9 P2.13 P2.14 U1.1 U1.2 U1.3 U1.4 U1.7 U1.8 U1.9 U1.18 U1.30 U1.34 U1.35 U1.36 U1.37 U1.39 U1.50 U1.70 U1.74 U1.75 U1.76 U1.77 U1.78 U1.79 U1.87 U1.88 U1.89 U1.90 U1.92 U2.4

## Text inside footprints (layer, text, board x,y; h text height)
P2: Top Overlay "2" at 12695,2080 h50 r90; Top Overlay "1" at 12795,2080 h50 r90; Top Overlay "14" at 12695,2880 h50 r90; Top Overlay "13" at 12795,2880 h50 r90
U1: Mechanical 13 "*" at 8218,2556.06 h50